# Altium PCB PCB_2021-12-09ad.pcbdoc
Units mil, origin at the board's own origin, x right, y up, seen from the top; angles counter-clockwise.
Board outline 4947 x 3665.4 mil, 2 copper layers (Top Layer, Bottom Layer); 62 components, 66 nets, 199 pads, 44 vias.
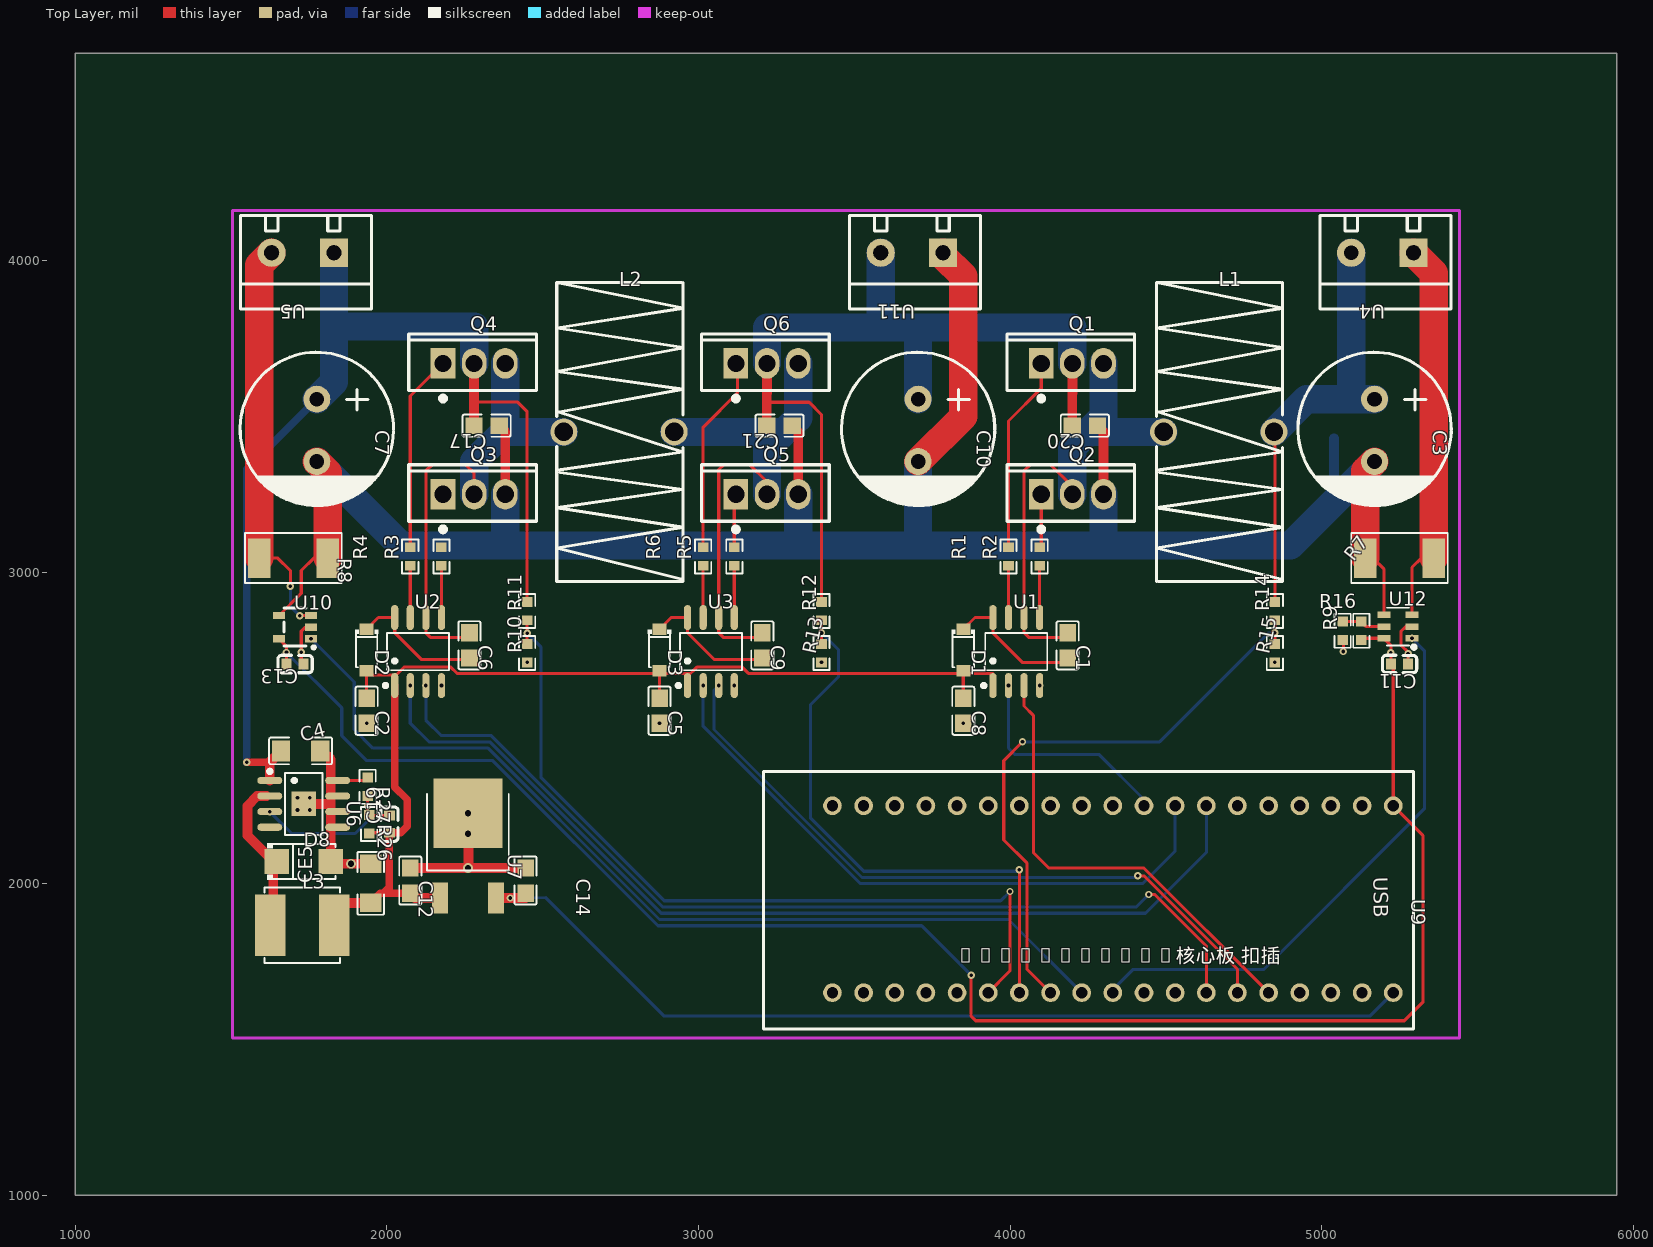
[diagram p0: Top Layer view]
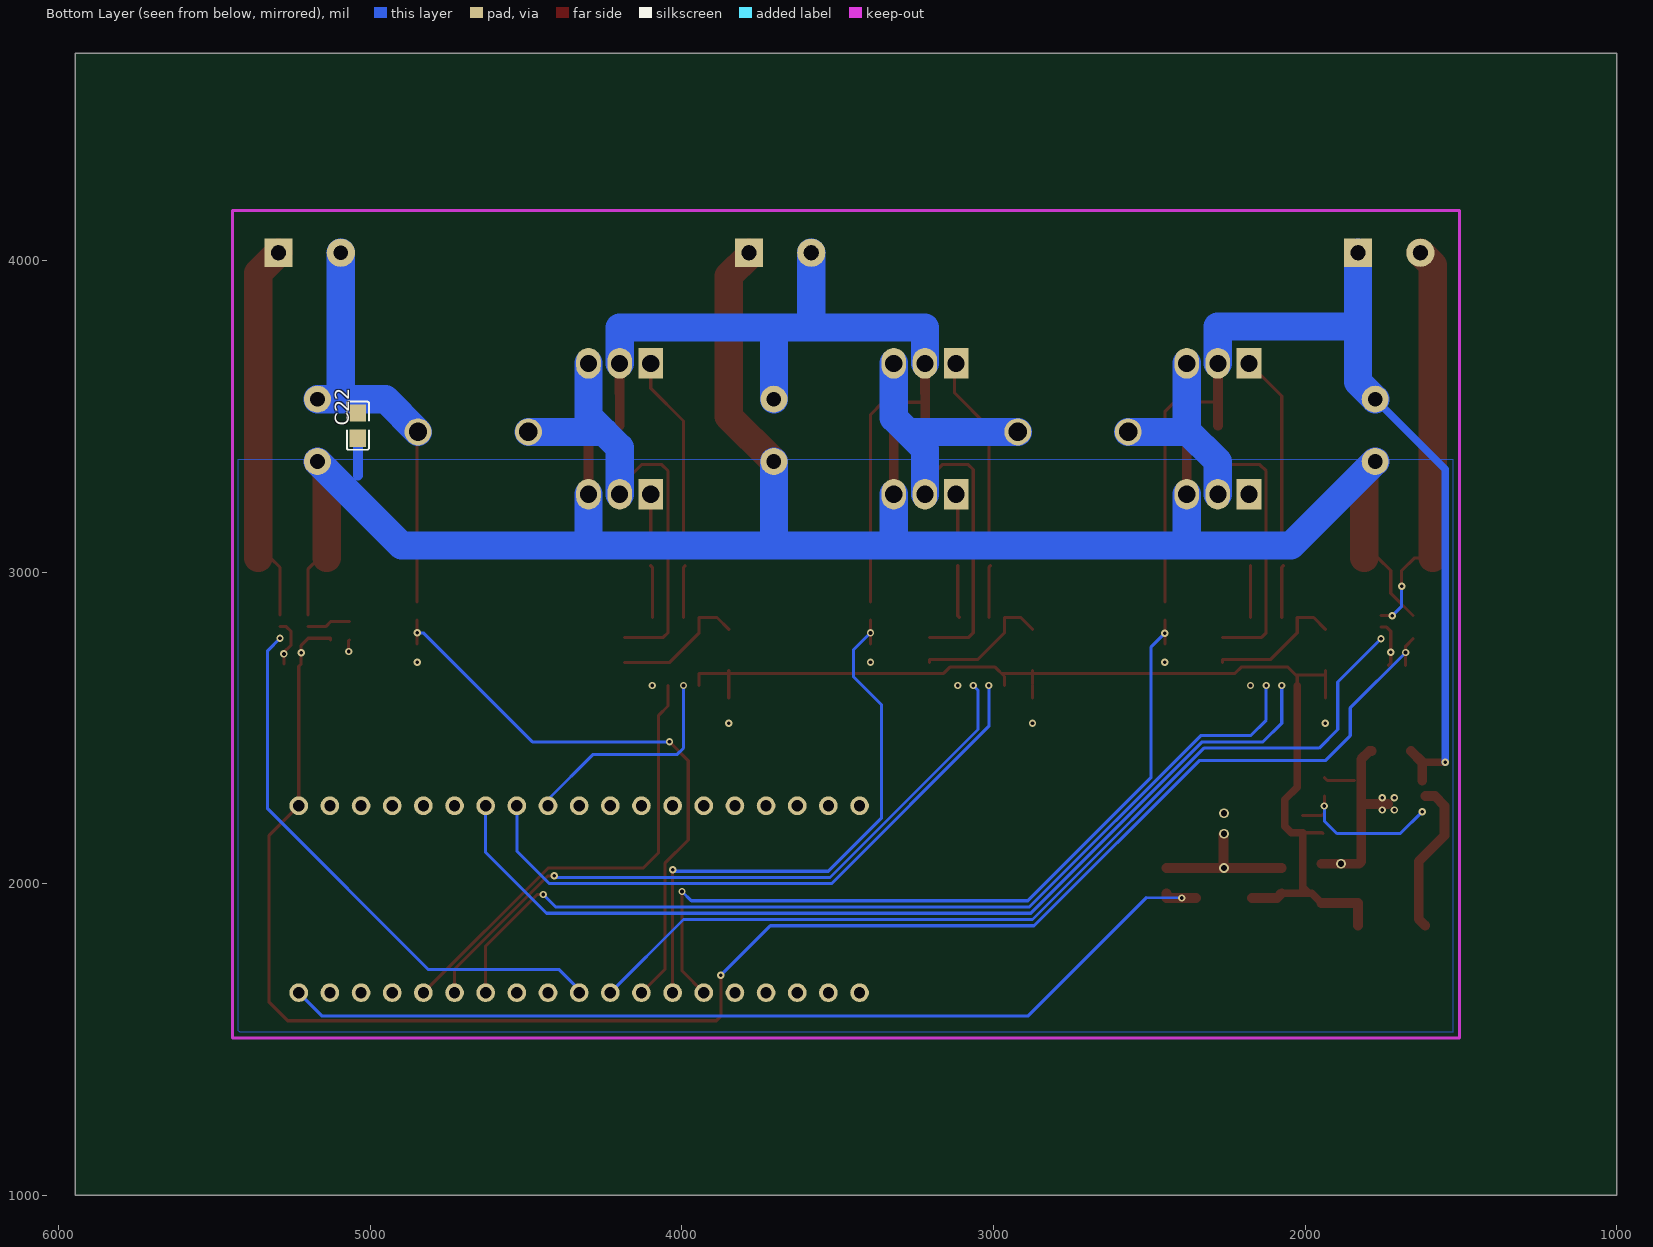
[diagram p1: Bottom Layer view, seen from below]

## Layer stack, top to bottom
Top Layer: signal copper (thickness not stored)
Dielectric: dielectric 12.6, FR-4, Dk 4.8
Bottom Layer: signal copper (thickness not stored)

## Board outline
5947,1000 1000,1000 1000,4665.4 5947,4665.4

## Components (designator, comment, footprint, x,y, rotation, side; value= is the part's Value field where it differs from the comment)
C1 "10u" C0805#1 4185,2765.4 r270 top
C2 "10u" C0805#1 1935,2555.4 r270 top
C3 "220μF" CAP-D12.5-F5.0 5170,3455.4 r270 top
C4 "10u" C1206 1723.04,2426.53 r0 top
C5 "10u" C0805#1 2875,2555.4 r270 top
C6 "10u" C0805#1 2265,2765.4 r270 top
C7 "220μF" CAP-D12.5-F5.0 1775,3455.4 r270 top
C8 "10u" C0805#1 3850,2555.4 r270 top
C9 "10u" C0805#1 3205,2765.4 r270 top
C10 "220μF" CAP-D12.5-F5.0 3705,3455.4 r270 top
C11 "0.1u" C0603 5250,2705.4 r180 top
C12 "0.1u" C0805#1 2075,2010.4 r270 top
C13 "0.1u" C0603 1705,2705.4 r180 top
C14 "0.1u" C0805#1 2445,2010.4 r270 top
C17 "0.1u" C0805#1 2320,3470.4 r180 top
C19 "0.1u" C0603 2008.04,2191.53 r90 top
C20 "0.1u" C0805#1 4240,3470.4 r180 top
C21 "0.1u" C0805#1 3260,3470.4 r180 top
C22 "0.1u" C0805#2 5040,3470.4 r270 bottom
CE5 "100u" C1206 1948.04,2001.53 r90 top
D1 "1N4148" SOD-123_L2.8-W1.8-LS3.7-RD 3850,2750.4 r270 top
D2 "1N4148" SOD-123_L2.8-W1.8-LS3.7-RD 1935,2750.4 r270 top
D3 "1N4148" SOD-123_L2.8-W1.8-LS3.7-RD 2875,2750.4 r270 top
D8 "SS110" SMA_L4.3-W2.6-LS5.2-RD 1733.04,2071.53 r0 top
L1 "220μH" T203125 4670,3450.4 r0 top
L2 "220μH" T203125 2745,3450.4 r0 top
L3 "100uH" IND-SMD_L6.0-W6.0_SWPA6045S 1728.04,1866.53 r0 top
Q1 "023N10N5" TO-220AB-3_L10.4-W4.6-P2.54-L 4200,3670.4 r0 top
Q2 "023N10N5" TO-220AB-3_L10.4-W4.6-P2.54-L 4200,3250.4 r0 top
Q3 "023N10N5" TO-220AB-3_L10.4-W4.6-P2.54-L 2280,3250.4 r0 top
Q4 "023N10N5" TO-220AB-3_L10.4-W4.6-P2.54-L 2280,3670.4 r0 top
Q5 "023N10N5" TO-220AB-3_L10.4-W4.6-P2.54-L 3220,3250.4 r0 top
Q6 "023N10N5" TO-220AB-3_L10.4-W4.6-P2.54-L 3220,3670.4 r0 top
R1 "10" R0603 3995,3050.4 r90 top
R2 "10" R0603 4095,3050.4 r90 top
R3 "10" R0603 2175,3050.4 r90 top
R4 "10" R0603 2075,3050.4 r90 top
R5 "10" R0603 3115,3050.4 r90 top
R6 "10" R0603 3015,3050.4 r90 top
R7 "10mΩ" R2512 5265,3045.4 r90 top
R8 "10mΩ" R2512 1685,3045.4 r270 top
R9 "1k" R0603 5067.56,2812.03 r90 top
R10 "2k" R0603 2450,2740.4 r90 top
R11 "36k" R0603 2450,2875.4 r90 top
R12 "36k" R0603 3395,2875.4 r90 top
R13 "2k" R0603 3395,2740.4 r90 top
R14 "36k" R0603 4850,2875.4 r90 top
R15 "2k" R0603 4850,2740.4 r90 top
R16 "1k" R0603 5127.56,2812.03 r270 top
R26 "10k" R0603 1943.04,2191.53 r270 top
R27 "1k" R0603 1938.04,2311.53 r270 top
U1 "EG3112" SOIC-8_L4.9-W3.9-P1.27-LS6.0-BL 4020,2745.4 r0 top
U2 "EG3112" SOIC-8_L4.9-W3.9-P1.27-LS6.0-BL 2100,2745.4 r0 top
U3 "EG3112" SOIC-8_L4.9-W3.9-P1.27-LS6.0-BL 3040,2745.4 r0 top
U4 "KF301-2P" KF301-5.0-2P#1 5295,4025.4 r180 top
U5 "KF301-2P" KF301-5.0-2P#2 1830,4025.4 r180 top
U6 "XL7005A" SOIC-8_L5.0-W4.0-P1.27-LS6.0-BL-EP2.0 1733.04,2256.53 r270 top
U7 "7805(TO-252)" PG-TO252-3_L6.6-W6.0-P4.56-LS10.0-BR-CW 2260,2090.4 r270 top
U9 "411CE核心板" "STM32F411CE核心板 扣插" 4230,1950.4 r270 top
U10 "INA180A1IDBVR" SOT-23-5_L3.0-W1.7-P0.95-LS2.8-BR 1705,2823.81 r0 top
U11 "KF301-2P" KF301-5.0-2P#2 3785,4025.4 r180 top
U12 "INA181A1IDBVR" SOT-23-6_L2.9-W1.6-P0.95-LS2.8-TL 5245,2825.4 r180 top

## Footprints (in the part's own frame and the unit in brackets; to place one, negate y for a bottom-side part, rotate by r counter-clockwise, add the part's x,y. Pads: shape width x height; smd on the part's side, far side on the other; paste and mask are expansions set on the pad)
C0603 [mm]
  rect 0.8x0.9 smd: 1(-0.7,0) 2(0.7,0)
  silkscreen extent -1.41,-0.71 1.39,0.72
C0805#1 [mm]
  rect 1.41x1.35 smd: 1(-1.03,0) 2(1.03,0)
  silkscreen extent -1.96,-0.9 1.96,0.9
C0805#2 [mm]
  rect 1.41x1.35 smd: 1(1.03,0) 2(-1.03,0)
  silkscreen extent -1.96,-0.9 1.96,0.9
C1206 [mm]
  rect 1.485x1.728 smd: 1(-1.593,0) 2(1.593,0)
  silkscreen extent -2.56,-1.09 2.56,1.09
CAP-D12.5-F5.0 [mm]
  round 2.2 hole 1.2: 1(-2.54,0) 2(2.54,0)
  silkscreen extent -6.37,-6.25 6.17,6.25
IND-SMD_L6.0-W6.0_SWPA6045S [mm]
  rect 2.474x5.02 smd: 1(2.603,0) 2(-2.603,0)
  silkscreen extent -3.08,-3.08 3.08,3.08
KF301-5.0-2P#1 [mm]
  rect 2.3x2.3 hole 1.2 slot 1.205 at 0 deg: 1(0,0)
  round 2.3 hole 1.2: 2(5.08,0)
  silkscreen extent -3.05,-3.05 7.62,4.57
KF301-5.0-2P#2 [mm]
  rect 2.3x2.3 hole 1.2 slot 1.205 at 0 deg: 1(0,0)
  round 2.3 hole 1.2 slot 1.205 at 0 deg: 2(5.08,0)
  silkscreen extent -3.05,-3.05 7.62,4.57
PG-TO252-3_L6.6-W6.0-P4.56-LS10.0-BR-CW [mm]
  rect 2.5x1.3 smd: 1(3.455,-2.28) 3(3.455,2.28)
  rect 5.7x5.6 smd: 2(-3.455,0)
  silkscreen extent -5.04,-3.33 1.21,3.33
R0603 [mil]
  rect 31.75x34.02 smd: 1(-29.66,0) 2(29.65,0)
  silkscreen extent -55,-26 55,26
R2512 [mil]
  rect 126.5x71.5 smd: 1(0,125) 2(0,-95)
  silkscreen extent -80,-140 80,170
SMA_L4.3-W2.6-LS5.2-RD [mm]
  rect 2x2 smd: 1(-2.2,0) 2(2.2,0)
  silkscreen extent -2.98,-1.5 2.6,1.5
SOD-123_L2.8-W1.8-LS3.7-RD [mm]
  rect 0.95x1.15 smd: 1(-1.693,0) 2(1.693,0)
  silkscreen extent -1.63,-0.94 1.41,0.94
SOIC-8_L4.9-W3.9-P1.27-LS6.0-BL [mm]
  oval 0.588x2.045 smd: 1(-1.905,-2.773) 2(-0.635,-2.773) 3(0.635,-2.773) 4(1.905,-2.773) 5(1.905,2.773) 6(0.635,2.773) 7(-0.635,2.773) 8(-1.905,2.773)
  silkscreen extent -2.8,-2.92 2.53,1.52
SOIC-8_L5.0-W4.0-P1.27-LS6.0-BL-EP2.0 [mm]
  oval 0.574x2.038 smd: 1(-1.905,-2.769) 2(-0.635,-2.769) 3(0.635,-2.769) 4(1.905,-2.769) 5(1.905,2.769) 6(0.635,2.769) 7(-0.635,2.769) 8(-1.905,2.769)
  rect 2x2 smd: 9(0,0)
  silkscreen extent -2.79,-2.92 2.53,1.52
SOT-23-5_L3.0-W1.7-P0.95-LS2.8-BR [mm]
  rect 1x0.6 smd: 1(1.3,-0.95) 2(1.3,0) 3(1.3,0.95) 4(-1.3,0.95) 5(-1.3,-0.95)
  silkscreen extent -0.9,-1.78 1.65,1.55
SOT-23-6_L2.9-W1.6-P0.95-LS2.8-TL [mm]
  rect 1.072x0.532 smd: 1(-1.149,0.95) 2(-1.149,0) 3(-1.149,-0.95) 4(1.149,-0.95) 5(1.149,0) 6(1.149,0.95)
  silkscreen extent -1.45,-1.54 0.89,1.82
"STM32F411CE核心板 扣插" [mil]
  round 60 hole 36: 1(-300,1000) 2(-300,900) 3(-300,800) 4(-300,700) 5(-300,600) 6(-300,500) 7(-300,400) 8(-300,300) 9(-300,200) 10(-300,100) 11(-300,0) 12(-300,-100) 13(-300,-200) 14(-300,-300) 15(-300,-400) 16(-300,-500) 17(-300,-600) 18(-300,-700) 19(-300,-800) 20(300,-800) 21(300,-700) 22(300,-600) 23(300,-500) 24(300,-400) 25(300,-300) 26(300,-200) 27(300,-100) 28(300,0) 29(300,100) 30(300,200) 31(300,300) 32(300,400) 33(300,500) 34(300,600) 35(300,700) 36(300,800) 37(300,900) 38(300,1000)
  silkscreen extent -410,-1022 417,1065
T203125 [mm]
  round 2.2 hole 1.5: 1(-4.5,0) 2(4.5,0)
  silkscreen extent -5.08,-12.19 5.21,12.19
TO-220AB-3_L10.4-W4.6-P2.54-L [mm]
  rect 2x2.5 hole 1.4: 1(-2.54,0)
  oval 2x2.5 hole 1.4: 2(0,0) 3(2.54,0)
  silkscreen extent -5.33,-3.07 5.08,2.4

## Via types
v1: diameter 23.62, hole 11.81, Top Layer to Bottom Layer, 36 vias
v2: diameter 24, hole 12, Top Layer to Bottom Layer, 4 vias
v3: diameter 31.5, hole 19.69, Top Layer to Bottom Layer, 4 vias

## Nets (pads, with @x,y where several pads share a name; then routed paths per layer and width w, separated by ;. In a path a pad name is that pad's centre, name@x,y a point inside that pad or via, vN(x,y) a via of type N, cw(c..) or ccw(c..) an arc to the next point about the centre after c; other vN are vias at no path point)
1.65V: R9.2 R16.1 U12.5 | length 138.9
  Top Layer w10: R9.2 R16.1 5143.85,2825.4 U12.5
12V: C2.1 C5.1 C8.1 C12.2 C19.1 CE5.1 D1.2 D2.2 D3.2 L3.1 R26.2 U1.1 U2.1 U3.1 U7.1 | length 3948.5
  Top Layer w10: C2.1 D2.2 ; D2.2 1935,2670.4 2025,2670.4 U2.1 2025,2665.4 2055,2695.4 2205,2695.4 2225,2675.4 D3.2@2875,2675.4 ; R26.2 1945.14,2163.97 C19.1 2008.05,1998.83 CE5.1 ; C5.1 2875,2636.2 ; 2875,2641.6 D3.2@2875,2675.4 ; D3.2 D3.2@2875,2675.4 ; U3.1 2965,2665.4 2995,2695.4 3140,2695.4 3160,2675.4 D1.2@3850,2675.4 ; 2975,2675.4 D3.2@2875,2675.4 ; C8.1 3850,2642.63 ; 3850,2636.2 D1.2@3850,2675.4 ; D1.2 D1.2@3850,2675.4 ; U1.1 3945,2675.4 D1.2@3850,2675.4
  Top Layer w23.62: CE5.1 1979.06,1969.85 C12.2 ; 2002,1969.85 2008.04,1975.9 C19.1 ; C19.1 2044.2,2164 2065,2184.8 2065,2270.4 2025,2310.4 U2.1
  Top Layer w31.5: L3.1 1830.53,1938.83 CE5.1 ; C12.2@2075,1969.85 2090.47,1954.38 U7.1
+3.3V: C11.2 C13.2 R16.2 U9.1 U10.5 U12.6 | length 5684.6
  Top Layer w10: U10.5 1677.44,2762.79 v1(1677.44,2742.33) C13.2@1677.44,2700.4 ; v1(3875,1706.52) 3875,1575.4 3890,1560.4 5265.7,1560.4 5325,1619.7 5325,2155.4 U9.1 5230,2697.84 C11.2 v1(5222.44,2741.08) 5222.44,2765.32 U12.6 ; R16.2 5127.6,2788 U12.6
  Bottom Layer w10: v1(1677.44,2742.33) 1855,2564.8 1855,2475.4 1935,2395.4 2340,2395.4 2870,1865.4 3716.1,1865.4 v1(3875,1706.52)
+5V: C14.2 U7.3 U9.38 | length 3133.7
  Top Layer w31.5: U7.3 v1(2395.51,1954.38) 2445,1954.38 C14.2@2445,1969.85
  Bottom Layer w10: v1(2395.51,1954.38) 2510,1955.4 2890,1575.4 5155,1575.4 U9.38
BATTERY: C3.1 C22.2 L1.2 R14.2 U4.2 | length 1383.8
  Top Layer w10: L1.2 4850,3447.57 R14.2
  Bottom Layer w90.55: L1.2 4952.17,3555.4 C3.1 ; 5092.77,3555.4 5095,3557.62 U4.2
BIN+: R7.2 U4.1 U12.3 | length 1241.9
  Top Layer w10: U12.3 5290.2,3015.6 5320,3045.4 R7.2
  Top Layer w90.55: U4.1 5360,3960.4 R7.2
C6_2: C6.2 D2.1 U2.8 | length 440.5
  Top Layer w10: D2.1 1972.52,2854.55 U2.8 ; U2.8 2025,2805.4 2110,2720.4 2265,2720.4 C6.2@2265,2709.9
C9_2: C9.2 D3.1 U3.8 | length 440.4
  Top Layer w10: D3.1 2912.52,2854.55 U3.8 ; U3.8 2965,2805.4 3050,2720.4 3205,2720.4 C9.2@3205,2709.9
C19_2: C19.2 R26.1 R27.2 U6.3 | length 536.2
  Top Layer w10: R27.2 v1(1938.04,2249.57) 1938.05,2226.2 R26.1 1945.14,2219.09 C19.2
  Bottom Layer w10: v1(1624.02,2231.53) 1694.02,2161.53 1898.05,2161.53 1938.05,2201.53 v1(1938.04,2249.57)
D8_1: D8.1 L3.2 U6.2 | length 500.5
  Top Layer w31.5: U6.2@1613.05,2281.53 1583.44,2281.53 1552.04,2249.23 1552.04,2154.93 1635.44,2071.53 1635.43,1887.4 L3.2@1614.57,1866.53
GND: C2.2 C3.2 C4.2 C5.2 C7.2 C8.2 C10.2 C11.1 C12.1 C13.1 C14.1 C17.1 C20.1 C21.1 C22.1 CE5.2 D8.2 Q2.3 Q3.3 Q5.3 R7.1 R8.1 R9.1 R10.1 R13.1 R15.1 R27.1 U1.4 U2.4 U3.4 U6.5 U6.6 U6.7 U6.8 U6.9 U7.2 U9.2 U9.37 U10.2 U10.4 U11.1 U12.2 U12.4 | length 8807.2
  Top Layer w10: U10.4 1725,2932.4 1725,3005.4 1765,3045.4 R8.1 ; C13.1@1732.6,2700.4 1725,2708 v1(1725,2742.66) 1725,2810.4 1738.4,2823.8 U10.2 ; U6.8 1928.38,2331.53 R27.1 ; R9.1 5070,2779.93 v1(5070,2745.4) ; R7.1 5165,3045.4 5199.8,3010.6 U12.4 ; C11.1 v1(5277.6,2737.77) 5277.6,2742.8 5255,2765.4 5255,2810.4 5270,2825.4 U12.2
  Top Layer w31.5: U6.9 1819.64,2256.53 ; C4.2 1793.05,2426.53 1819.64,2399.93 1819.64,2256.53 ; CE5.2 v3(1885.06,2064.23) 1826.96,2064.23 D8.2 1819.64,2256.53 ; C12.1 v3(2260.7,2050.95) C14.1 ; v3(2260,2160.4) 2261.49,2158.91 v3@2261.49,2050.95 ; C17.1 2380,3450.95 Q3.3 ; C21.1 3320,3450.95 Q5.3 ; C20.1 4300,3450.95 Q2.3
  Top Layer w90.55: C7.2 1810,3320.4 R8.1 ; C10.2 3850,3500.4 3850,3950.4 3785,4015.4 U11.1 ; R7.1 5140,3325.4 C3.2
  Bottom Layer w31.5: 5040,3310.4 C22.1
  Bottom Layer w90.55: C7.2 2045,3085.4 2380,3085.4 ; Q3.3 2380,3085.4 ; Q5.3 3320,3085.4 4300,3085.4 ; 3485,3085.4 2380,3085.4 ; 3666.3,3085.4 3705,3085.4 C10.2 ; Q2.3 4300,3085.4 ; C3.2 4900,3085.4 4300,3085.4
  other v1: 1935,2514.85 2875,2514.85 3850,2514.85 2175,2636.25 3115,2636.25 4095,2636.25 2450,2710.74 3395,2710.74 4850,2710.74
  other v2: 1713.35,2236.84 1752.72,2236.84 1713.35,2276.21 1752.72,2276.21
  other v3: 2260,2226.43
IIN+: R8.2 U5.2 U10.3 | length 1306.8
  Top Layer w10: R8.2 1650,3045.4 1690,3005.4 v1(1690,2955.4) ; v1(1720,2860.4) U10.3
  Top Layer w90.55: R8.2 1590,3985.4 U5.2
  Bottom Layer w10: v1(1690,2955.4) 1690,2890.4 v1(1720,2860.4)
L2_1: C6.1 L2.1 Q3.2 Q4.3 U2.6 | length 1612.4
  Top Layer w10: C6.1@2265,2790.9 2139.5,2790.9 2125,2805.4 U2.6 2125,3325.4 2145,3345.4 2252.4,3345.4 2280,3317.8 Q3.2
  Bottom Layer w90.55: Q3.2 2280,3355.4 2380,3455.4 Q4.3 ; 2380,3505.4 2380,3450.4 L2.1
L2_2: C9.1 L2.2 Q5.2 Q6.3 U3.6 | length 1702.7
  Top Layer w10: C9.1@3205,2790.9 3079.5,2790.9 3065,2805.4 U3.6 3065,3329.7 3080.7,3345.4 3165,3345.4 3220,3290.4 Q5.2
  Bottom Layer w90.55: L2.2 3268.9,3450.4 ; Q5.2 3220,3395.4 3320,3495.4 Q6.3
PA0: R10.2 R11.1 U9.25 | length 2592.9
  Top Layer w10: R10.2 v1(2450,2803.86) R11.1 ; U9.25 4000,1720.4 v1(4000,1975.4)
  Bottom Layer w10: v1(2450,2803.86) 2495,2758.9 2495,2340.4 2890,1945.4 3970,1945.4 v1(4000,1975.4)
PA1: R12.1 R13.2 U9.26 | length 1871
  Top Layer w10: R13.2 v1(3395,2805.2) R12.1 ; U9.26 v1(4030,2045.4)
  Bottom Layer w10: v1(3395,2805.2) 3450,2750.2 3450,2665.4 3360,2575.4 3360,2210.4 3530,2040.4 4030,2040.4 v1(4030,2045.4)
PA2: R14.1 R15.2 U9.27 | length 1922.8
  Top Layer w10: v1(4040,2455.4) 3980,2395.4 3980,2140.4 4055,2065.4 4055,1725 U9.27 ; R15.2 v1(4850,2805.53) R14.1
  Bottom Layer w10: v1(4040,2455.4) 4480,2455.4 4830.1,2805.5 v1(4850,2805.53)
PA3: U9.28 U10.1 | length 3033.5
  Bottom Layer w10: v1(1756.18,2786.41) 1895,2647.6 1895,2495.4 1955,2435.4 2325,2435.4 2790,1970.4 2875,1885.4 3995,1885.4 U9.28
PA4: U9.29 U12.1 | length 1814.3
  Bottom Layer w10: U9.29 4330,1660.4 4395,1725.4 4815,1725.4 5330,2240.4 5330,2748.2 v1(5290.24,2788)
PA7: U2.3 U9.32 | length 3099.2
  Top Layer w10: v1(4445,1965.4) 4465,1965.4 4630,1800.4 U9.32
  Bottom Layer w10: v1(2125,2636.25) 2125,2525.4 2175,2475.4 2335,2475.4 2885,1925.4 2929.4,1925.4 4405,1925.4 v1(4445,1965.4)
PA8: U2.2 U9.7 | length 3159.2
  Bottom Layer w10: v1(2075,2636.25) 2075,2515.4 2135,2455.4 2330,2455.4 2880,1905.4 4435,1905.4 4630,2100.4 U9.7
PA9: U3.2 U9.8 | length 2043.5
  Bottom Layer w10: v1(3015,2636.25) 3015,2505.4 3520,2000.4 4425,2000.4 4530,2105.4 U9.8
PA10: U1.2 U9.9 | length 724.1
  Bottom Layer w10: v1(3995,2636.25) 3995,2435.4 4015,2415.4 4285,2415.4 4430,2270.4 U9.9
PB0: U3.3 U9.33 | length 2228
  Top Layer w10: v1(4410,2025.4) 4430,2025.4 4730,1725.4 U9.33
  Bottom Layer w10: v1(3065,2636.25) 3050,2621.2 3050,2495.4 3525,2020.4 4410,2020.4 v1(4410,2025.4)
PB1: U1.3 U9.34 | length 1489.6
  Top Layer w10: U1.3 4045,2570.4 4075,2540.4 4075,2100.4 4125,2050.4 4430,2050.4 U9.34
Q3_1: Q3.1 R3.2
Q4_1: Q4.1 R4.2 | length 633.8
  Top Layer w10: R4.2 2075,3565.4 Q4.1
Q5_1: Q5.1 R5.2 | length 172.4
  Top Layer w10: R5.2 3115,3245.4 Q5.1
Q6_1: Q6.1 R6.2 | length 635.9
  Top Layer w10: R6.2 3015,3465.4 3125,3575.4 Q6.1@3125,3670.4
R1_2: Q1.1 R1.2 | length 638.8
  Top Layer w10: R1.2@3990,3080.1 R1.2 3995,3485.4 4100,3590.4 Q1.1
R2_2: Q2.1 R2.2 | length 170.3
  Top Layer w10: R2.2@4100,3080.06 Q2.1
R3_1: R3.1 U2.5 | length 166.2
  Top Layer w10: U2.5 R3.1
R4_1: R4.1 U2.7 | length 168.3
  Top Layer w10: R4.1@2070,3020.74 2075,3015.74 U2.7
R5_1: R5.1 U3.5 | length 168.3
  Top Layer w10: U3.5@3110,2855.4 3115,2860.4 R5.1@3115,3021.59
R6_1: R6.1 U3.7 | length 168.3
  Top Layer w10: R6.1@3010,3020.74 3015,3015.74 U3.7
S$6147: 
U1_5: R2.1 U1.5 | length 168.3
  Top Layer w10: U1.5 4095,3015.74 R2.1@4100,3020.74
U1_6: C1.1 L1.1 Q1.3 Q2.2 U1.6 | length 1588.7
  Top Layer w10: C1.1@4185,2790.9 4059.5,2790.9 4045,2805.4 U1.6 4045,3325.4 4065,3345.4 4130,3345.4 4200,3275.4 Q2.2
  Bottom Layer w90.55: Q2.2 4200,3400.4 4300,3500.4 Q1.3 ; 4248.86,3450.4 L1.1
U1_7: R1.1 U1.7 | length 168.3
  Top Layer w10: R1.1@3990,3020.74 3995,3015.74 U1.7
U1_8: C1.2 D1.1 U1.8 | length 439.3
  Top Layer w10: D1.1 3887.52,2854.55 U1.8 ; U1.8 3945,2805.4 4040.5,2709.9 C1.2@4185,2709.9
U6_4: U6.4
U9_3: U9.3
U9_4: U9.4
U9_5: U9.5
U9_6: U9.6
U9_10: U9.10
U9_11: U9.11
U9_12: U9.12
U9_13: U9.13
U9_14: U9.14
U9_15: U9.15
U9_16: U9.16
U9_17: U9.17
U9_18: U9.18
U9_19: U9.19
U9_20: U9.20
U9_21: U9.21
U9_22: U9.22
U9_23: U9.23
U9_24: U9.24
U9_30: U9.30
U9_31: U9.31
U9_35: U9.35
U9_36: U9.36
VIN: C4.1 C7.1 C17.2 Q4.2 R11.2 U5.1 U6.1 | length 3529.5
  Top Layer w10: 2279.63,3545.83 2419.57,3545.83 2450,3515.4 R11.2
  Top Layer w23.62: v1(1550,2390.4) 1624,2390.2
  Top Layer w31.5: U6.1 1624.03,2390.21 C4.1 ; C17.2 Q4.2
  Bottom Layer w23.62: v1(1550,2390.4) 1550,3330.39 C7.1
  Bottom Layer w90.55: C7.1 1830,3610.4 1830,3755.4 ; U5.1 1830,3755.4 ; Q4.2 2280,3788.48 1830,3788.5 1830,3755.4
VOUT: C10.1 C20.2 C21.2 Q1.2 Q6.2 R12.2 U11.2 | length 3024.8
  Top Layer w10: 3219.7,3563.3 3219.7,3545.4 3355,3545.4 3395,3505.4 R12.2
  Top Layer w31.5: C21.2 Q6.2 ; C20.2 Q1.2
  Bottom Layer w90.55: Q6.2 3220,3785.4 4200,3785.4 Q1.2 ; U11.2 3585,3795.8 3574.6,3785.4 3705,3785.4 C10.1

## Polygon pours and split planes (outlines as drawn)
GND on Bottom Layer (solid): 1525,3360.4 5425,3360.4 5425,1530.4 5420,1525.4 1525,1525.4

## Text inside footprints (layer, text, board x,y; h text height)
U9: Top Overlay "STM32F411CE核心板 扣插" at 3825,1730.4 h80; Top Overlay "USB" at 5150,2020.4 h80 r271